# Altium PCB Copy of EVB_gate driver.PcbDoc
Units mil, origin at the board's own origin, x right, y up, seen from the top; angles counter-clockwise.
Board outline 1180 x 1310 mil, 2 copper layers (Top Layer, Bottom Layer); 26 components, 19 nets, 82 pads, 0 vias.
Unrouted connection lines stored in the file: 62.
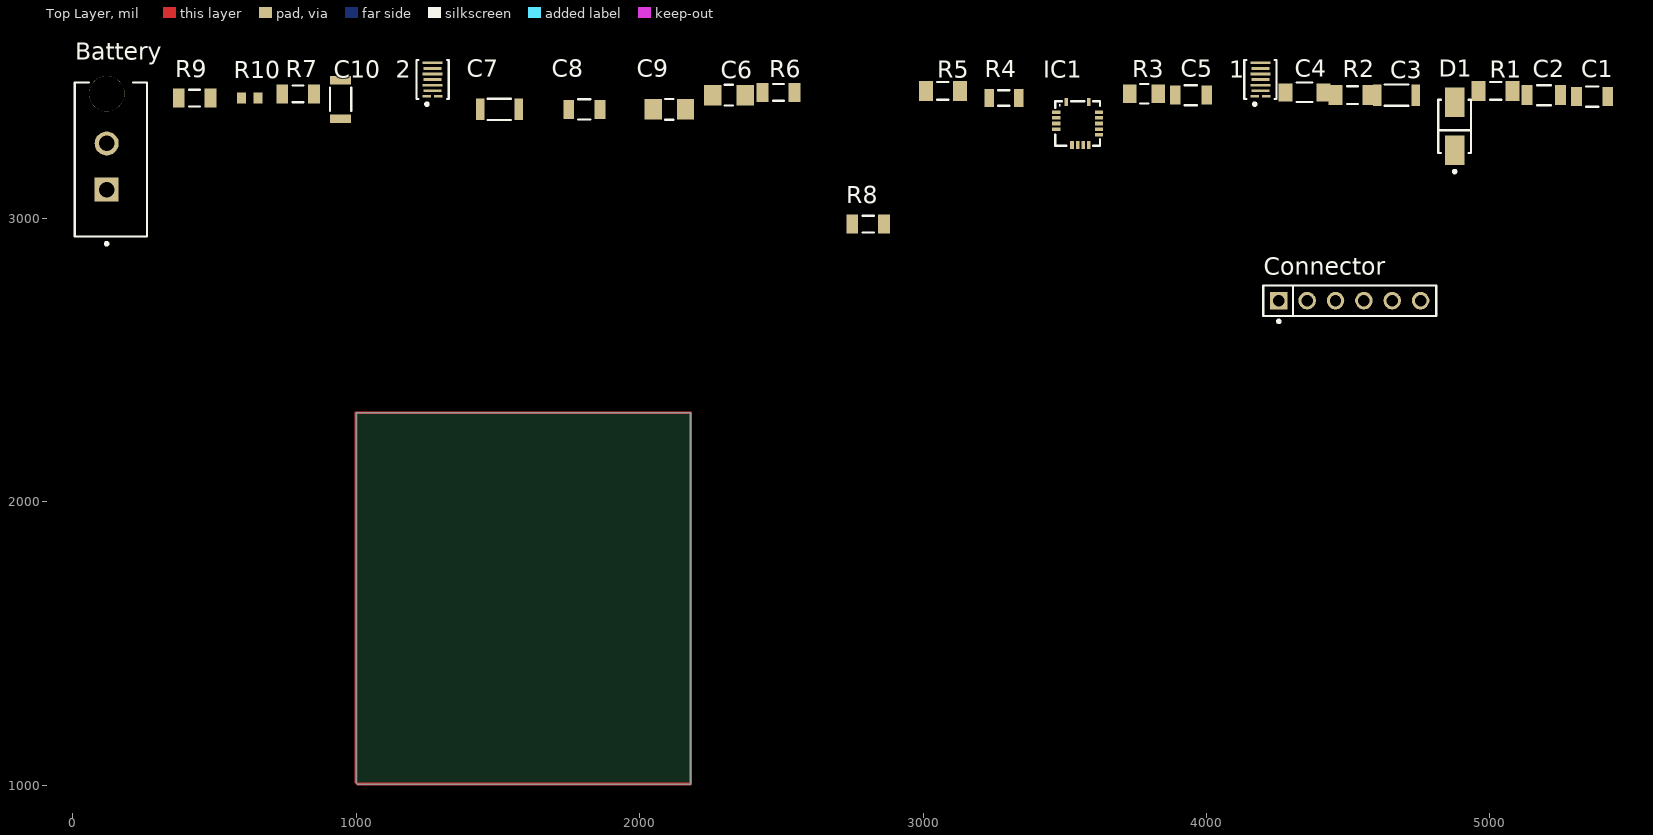
[diagram p0: Top Layer view]
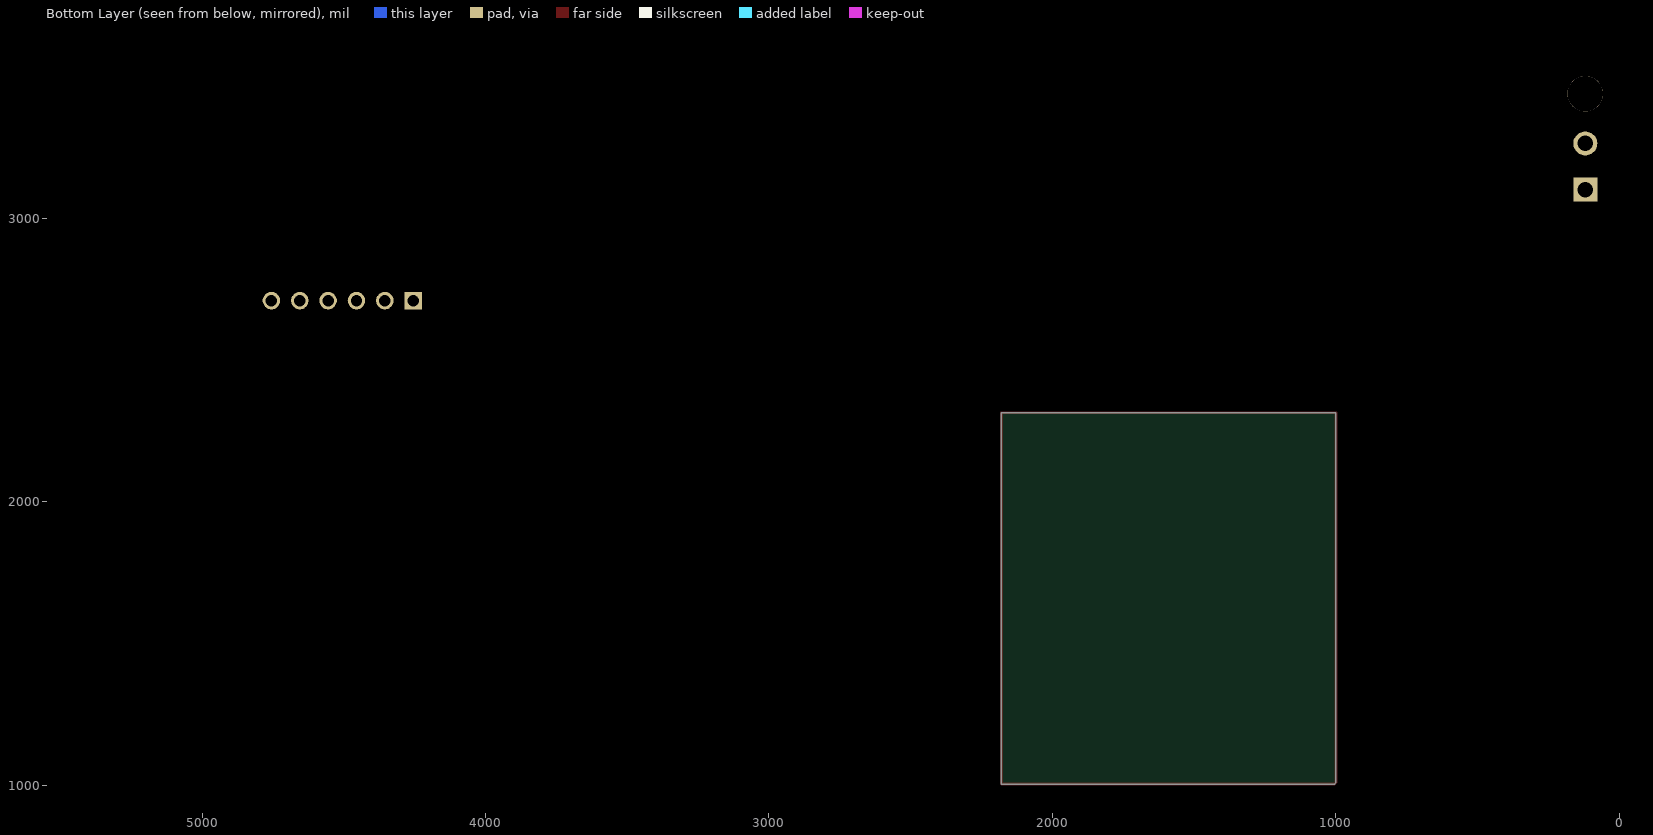
[diagram p1: Bottom Layer view, seen from below]

## Layer stack, top to bottom
Top Solder: solder mask 0.4, Solder Resist, Dk 3.5
Top Layer: signal copper 1.4
Dielectric 1: dielectric 12.6, FR-4, Dk 4.8
Bottom Layer: signal copper 1.4
Bottom Solder: solder mask 0.4, Solder Resist, Dk 3.5

## Board outline
2180,1005 2180,2315 1000,2315 1000,1010 1005,1005

## Design rules (kind name [scope] priority, off if disabled: settings)
Clearance [All] p1: gap=10 ignorepadtopadclearanceinfootprint=FALSE
PolygonConnect [All] p1: connectstyle=Relief reliefconductorwidth=10 reliefentries=4 polygonreliefangle="90 Angle" airgapwidth=10
RoutingVias [All] p1: holewidth=28 width=50 viastyle="Through Hole" minholewidth=28 minwidth=50 maxholewidth=28 maxwidth=50
SolderMaskExpansion [All] p1: expansion=4 istentingtop=FALSE
SupplyNets "Schematic Supply Nets" [InNet('GND')] p1: voltage=0.000
Width [All] p1: maxlimit=10 minlimit=10 preferedwidth=10
30 further rules are at their usual default settings.

## Classes and differential pairs
component class EVB_Gatedriver: 1 2 Battery C1 C2 C3 C4 C5 C6 C7 C8 C9 C10 Connector D1 IC1 R1 R2 R3 R4 R5 R6 R7 R9

## Components (designator, comment, footprint, x,y, rotation, side; value= is the part's Value field where it differs from the comment)
1 "GAN3R2-100CBE" FP-WLCSP8-SOT8072-MFG 4190.28,3490 r90 top
2 "GAN3R2-100CBE" FP-WLCSP8-SOT8072-MFG 1270.28,3490 r90 top
Battery "1-770166-1" FP-1-770166-1-MFG 135.43,3208.11 r90 top
C1 "10PF" FP-C1206C-EB-MFG 5360.28,3430 r0 top value="10 pF"
C2 "1uF" FP-CC1206-1_25-MFG 5190.28,3435 r0 top value="1 uF"
C3 "50u" FP-CGA5L-0_3-0_1-IPC_B 4670.28,3435 r0 top
C4 "100nF" FP-1206-L_3_2_0_15-W_1_6-MFG 4345.28,3445 r0 top
C5 "470uF" FP-C1206C-EB-MFG 3945.28,3435 r0 top value="0.47 μF"
C6 "1uF" FP-1206-L_3_2_0_15-W_1_6-IPC_A 2315.28,3435 r0 top
C7 "100uF" FP-CGA5L-0_3-0_1-IPC_B 1505.28,3385 r0 top
C8 "0.1uF" FP-C1206C-EB-MFG 1805.28,3385 r0 top value="0.10 μF"
C9 "1uF" FP-1206-L_3_2_0_15-W_1_6-IPC_A 2105.28,3385 r0 top
C10 "10u" FP-CGA5L-0_3-0_1-IPC_B 945.28,3420 r90 top
Connector "" FP-22-28-4060-MFG 4505.28,2710 r0 top
D1 "ES1J" FP-403AE-MFG 4875.28,3325 r90 top value=10pF
IC1 "NCP51820" NCP51820 3545.28,3335 r0 top
R1 "10K" RESC3116X65X40ML10T20 5020.28,3450 r0 top
R2 "10" RESC3116X65X40ML10T20 4515.28,3435 r0 top
R3 "2.0" FP-RMCF1206-IPC_C 3780.28,3440 r0 top
R4 "60.4" RESC3116X65X40LL10T20 3285.28,3425 r0 top
R5 "10" RESC3116X65X40ML10T20 3070.28,3450 r0 top
R6 "10" RESC3116X65X40NL10T20 2490.28,3445 r0 top
R7 "2.0" RESC3116X65X40NL10T20 795.28,3440 r0 top
R8 "10" RESC3116X65X40NL10T20 2806.38,2980 r0 top
R9 "2.0" RESC3116X65X40NL10T20 430.28,3425 r0 top
R10 "0" RESC1608X55X25ML10T15 625.28,3425 r0 top

## Footprints (in the part's own frame and the unit in brackets; to place one, negate y for a bottom-side part, rotate by r counter-clockwise, add the part's x,y. Pads: shape width x height; smd on the part's side, far side on the other; paste and mask are expansions set on the pad)
FP-1-770166-1-MFG [mm]
  rect 2.15x2.15 hole 1.4 paste-2539.97 mask+0: 1(-2.7,0.385)
  round 2.15 hole 1.4 paste-2539.97 mask+0: 2(1.44,0.385)
  round 3.18 hole 3.18 unplated paste-2539.97 mask+0: ""(5.89,0.385)
  silkscreen extent -7.67,-3.24 6.91,3.24, body extent -7.01,-3.34 7.58,3.34, height 0.25
FP-22-28-4060-MFG [mm]
  rect 1.57x1.57 hole 1.02 paste-2539.97 mask+0: 1(-6.35,0)
  round 1.57 hole 1.02 paste-2539.97 mask+0: 2(-3.81,0) 3(-1.27,0) 4(1.27,0) 5(3.81,0) 6(6.35,0)
  silkscreen extent -7.75,-1.97 7.75,1.37, body extent -7.85,-1.47 7.85,1.47, height 0.25
FP-403AE-MFG [mm]
  rect 2.65x1.75 smd paste+0 mask+0: 1(-2.15,0) 2(2.15,0)
  silkscreen extent -4.17,-1.48 2.37,1.48, body extent -3.57,-1.58 3.57,1.58, height 0.25
FP-1206-L_3_2_0_15-W_1_6-IPC_A [mil]
  rect 61.24x73.16 smd paste+0 mask+0: 1(-57.14,0) 2(57.14,0)
  silkscreen extent -15,-37 15,37, body extent -107,-56 107,56, height 10
FP-1206-L_3_2_0_15-W_1_6-MFG [mm]
  rect 1.25x1.6 smd paste+0 mask+0: 1(-1.7,0) 2(1.7,0)
  silkscreen extent -0.7,-0.87 0.7,0.87, body extent -2.42,-0.97 2.42,0.97, height 0.25
FP-C1206C-EB-MFG [mm]
  rect 0.95x1.7 smd paste+0 mask+0: 1(-1.4,0) 2(1.4,0)
  silkscreen extent -0.55,-0.9 0.55,0.9, body extent -2,-1 2,1, height 0.25
FP-CC1206-1_25-MFG [mm]
  rect 1x1.8 smd paste+0 mask+0: 1(-1.5,0) 2(1.5,0)
  silkscreen extent -0.63,-0.9 0.63,0.9, body extent -2.2,-1.25 2.2,1.25, height 0.25
FP-CGA5L-0_3-0_1-IPC_B [mm]
  rect 0.756x1.906 smd paste+0 mask+0: 1(-1.725,0) 2(1.725,0)
  silkscreen extent -1.05,-0.95 1.05,0.95, body extent -2.35,-1.2 2.35,1.2, height 0.25
FP-RMCF1206-IPC_C [mil]
  rect 47.39x65.28 smd paste+0 mask+0: 1(-50.22,0) 2(50.22,0)
  silkscreen extent -15,-34 15,34, body extent -78,-38 78,38, height 10
FP-WLCSP8-SOT8072-MFG [mm]
  rect 0.25x0.77 smd paste-1000 mask+0: 1(-1.5,0.512) 2(-1.5,-0.513)
  rect 0.25x1.62 smd paste-1000 mask+0: 3(-1,0) 5(0,0) 7(1,0)
  rect 0.25x1.8 smd paste-1000 mask+0: 4(-0.5,0) 6(0.5,0) 8(1.5,0)
  silkscreen extent -2.32,-1.44 1.75,1.44, body extent -1.85,-1.17 1.85,1.17, height 0.25
NCP51820 [mm]
  rect 0.75x0.32 smd: 1(-1.925,1) 2(-1.925,0.5) 3(-1.925,0) 4(-1.925,-0.5) 9(1.925,-1) 10(1.925,-0.5) 11(1.925,0) 12(1.925,0.5) 13(1.925,1)
  rect 0.32x0.75 smd: 5(-0.5,-1.925) 6(0,-1.925) 7(0.5,-1.925) 8(1,-1.925) 14(1,1.925) 15(-1,1.925)
  silkscreen extent -2,-2 2,2, body extent -1.84,-2.14 2.2,1.9, height 0.89
RESC1608X55X25ML10T15 [mm] "Chip Resistor, 2-Leads, Body 1.60x0.80mm, IPC Low Density"
  rect 0.8x1 smd: 1(-0.75,0) 2(0.75,0)
  body extent -0.85,-0.45 0.85,0.45, height 0.55
RESC3116X65X40LL10T20 [mm] "Chip Resistor, 2-Leads, Body 3.10x1.60mm, IPC High Density"
  rect 0.85x1.6 smd: 1(-1.325,0) 2(1.325,0)
  silkscreen extent -0.5,-0.7 0.5,0.7, body extent -1.6,-0.85 1.6,0.85, height 0.65
RESC3116X65X40ML10T20 [mm] "Chip Resistor, 2-Leads, Body 3.10x1.60mm, IPC Low Density"
  rect 1.25x1.8 smd: 1(-1.525,0) 2(1.525,0)
  silkscreen extent -0.5,-0.8 0.5,0.8, body extent -1.6,-0.85 1.6,0.85, height 0.65
RESC3116X65X40NL10T20 [mm] "Chip Resistor, 2-Leads, Body 3.10x1.60mm, IPC Medium Density"
  rect 1.05x1.7 smd: 1(-1.425,0) 2(1.425,0)
  silkscreen extent -0.5,-0.75 0.5,0.75, body extent -1.6,-0.85 1.6,0.85, height 0.65

## Part data
1 2: library part GAN3R2-100CBE_1, "GAN3R2-100CBE                                                                                                                                                                                                                                                     100 V, 3.2 mOhm Gallium Nitride (GaN) FET in a 3.5 mm x 2.13 mm Wafer Level Chip", Continuous Drain Current (ID)=60A, Drain to Source Breakdown Voltage=100V, Drain to Source Resistance=2.4mΩ, Gate to Source Voltage (Vgs)=-4V, Max Junction Temperature (Tj)=150°C, Min Operating Temperature=-40°C, Power Dissipation=394W, Drain to Source Voltage (Vdss)=100V, Height=464µm, Max Operating Temperature=150°C, MPN=GAN3R2-100CBE, NexarPartId=136220986, Number of Channels=1
Battery: library part CMP-03369-000027-1, "CONN HEADER VERT 2POS 4.14MM", Current Rating=9.5A, Manufacturer="TE Connectivity", Temperature="-55°C to +105°C", Temperature Range High=+105°C, Temperature Range Low=-55°C, Voltage Rating=600V, Automotive=No, Category=Conn, ComponentLink2Description=Datasheet, ComponentLink2URL=https://www.te.com/commerce/DocumentDelivery/DDEController?Action=showdoc&DocId=Customer+Drawing%7F770166%7FM%7Fpdf%7FEnglish%7FENG_CD_770166_M.pdf%7F1-770166-1, Conn Gender=Male, Conn Orientation=Vertical, Contact Material=Gold,Nickel, Device Class L1=Connectors, Device Class L2="Headers and Wire Housings", Device Class L3=unset, Digikey Description="CONN HEADER VERT 2POS 4.14MM", Height=14.51mm, Is Female=yes, Lead Free=Yes, Manufacturer Part Number=1-770166-1, Mouser Description="Mini-Universal MATE-N-LOK 2 Position Single Row Through-Hole Straight Pin Header", MPN=1-770166-1, Number Of Contacts=2, Number Of Rows=1, Octopart=https://octopart.com/1-770166-1-te+connectivity-46507887, Package=1-770166-1, Pitch=4.14mm, RoHS=TRUE, Standoff Height=0.63mm
C1: library part CMP-1037-00647-2, "CAP CER 10PF 50V C0G/NP0 1206", Capacitance="10 pF", Manufacturer=KEMET, Manufacturer Part Number=C1206C100J5GACTU, Package=C1206C-EB, Temperature="-55°C to +150°C", Temperature Characteristic=C0G, Temperature Coefficient=15%, Temperature Range High=+150°C, Temperature Range Low=-55°C, Tolerance=0.05, Voltage Rating="50 V", Automotive=Yes, Automotive Grade="Grade 0", Category=Cap, ComponentLink2Description=Datasheet, ComponentLink2URL=https://content.kemet.com/datasheets/KEM_C1007_X8R_ULTRA_150C_SMD.pdf, Device Class L1="Passive Components", Device Class L2=Capacitors, Device Class L3="Ceramic Capacitors", Digikey Description="CAP CER 10PF 50V C0G/NP0 1206", Height=0.88mm, Ipc Land Pattern Name=CAPC320160X78, Lead Free=Yes, Material=Ceramic, Mouser Description="Multilayer Ceramic Capacitors MLCC - SMD/SMT 50volts 10pF C0G 5%", Octopart=https://octopart.com/c1206c100j5gactu-kemet-87062, RoHS=TRUE
C2: library part CMP-1037-04701-3, "CAP CER 1UF 25V X7R 1206", Capacitance="1 uF", Manufacturer=Yageo, Manufacturer Part Number=CC1206KKX7R8BB105, Package=CC1206-1.25, Temperature="-55°C to +125°C", Temperature Characteristic=X7R, Temperature Coefficient=15%, Temperature Range High=+125°C, Temperature Range Low=-55°C, Tolerance=0.1, Voltage Rating="25 V", Automotive=No, Automotive Grade=NA, Category=Cap, ComponentLink2Description=Datasheet, ComponentLink2URL=http://www.yageo.com/documents/recent/UPY-NP0X7R_HV_1KV-to-3KV_11.pdf, Device Class L1="Passive Components", Device Class L2=Capacitors, Device Class L3="Ceramic Capacitors", Digikey Description="CAP CER 1UF 25V X7R 1206", Footprint Url=http://www.yageo.com/exep/pages/download/literatures/UPY-C_GEN_24.pdf, Height=1.45mm, Lead Free=Yes, Material=Ceramic, Mouser Description="Surface Mount Ceramic Multilayer Capacitor 1uF 10% X7R 25V 1206 Blister T/R", Octopart=https://octopart.com/cc1206kkx7r8bb105-yageo-11543785, RoHS=TRUE
C3 C7 C10: library part CMP-08246-001673-1, "Cap Ceramic 100nF 450V X7T 10% Pad SMD 1206 +125°C Automotive T/R", Capacitance=100nF, Case Code (Imperial)=1206, Case Code (Metric)=3216, Dielectric=X7T, Max Operating Temperature=125°C, Min Operating Temperature=-55°C, Package Quantity=1, Ratings=AEC-Q200, Tolerance=10%, Voltage Rating=450V, Case/Package=1206, Depth=1.6mm, Features="Soft Termination", Height=1.6mm, Lead Free="Lead Free", Length=3.2mm, Mount="Surface Mount", Packaging="Tape and Reel", REACH SVHC="No SVHC", Termination=SMD/SMT, Thickness=0.075inch, Voltage Rating (DC)=450V, Weight=0.000571oz, Width=0.063inch
C4: library part CMP-14477-000033-2, "None", RoHS Compliant=Yes
C5: library part CMP-1037-04557-2, "CAP CER 0.47UF 25V X5R 1206", Capacitance="0.47 μF", Manufacturer=KEMET, Manufacturer Part Number=C1206C474K3PACTU, Package=C1206C-EB, Temperature="-55°C to +150°C", Temperature Characteristic=X5R, Temperature Coefficient=15%, Temperature Range High=+150°C, Temperature Range Low=-55°C, Tolerance=0.1, Voltage Rating="25 V", Automotive=Yes, Automotive Grade="Grade 0", Category=Cap, ComponentLink2Description=Datasheet, ComponentLink2URL=https://content.kemet.com/datasheets/KEM_C1007_X8R_ULTRA_150C_SMD.pdf, Device Class L1="Passive Components", Device Class L2=Capacitors, Device Class L3="Ceramic Capacitors", Digikey Description="CAP CER 0.47UF 25V X5R 1206", Height=0.88mm, Ipc Land Pattern Name=CAPC320160X78, Lead Free=Yes, Material=Ceramic, Mouser Description="Multilayer Ceramic Capacitors MLCC - SMD/SMT 25volts 0.47uF X5R 10%", Octopart=https://octopart.com/c1206c474k3pactu-kemet-16430430, RoHS=TRUE
C6 C9: library part CMP-14477-003409-2, "None", Case Code (Imperial)=1206, Case Code (Metric)=3216, Dielectric=X5R, Max Operating Temperature=85°C, Min Operating Temperature=-55°C, Package Quantity=1, Resistor Type=Ceramic, Tolerance=10%, Voltage=25V, Capacitance=1uF, Case/Package=1206, Construction=Flat, Depth=1.6mm, Halogen Free="Halogen Free", Height=0.85mm, Lead Free="Lead Free", Length=3.2mm, Mount="Surface Mount", Number of Pins=2, Packaging="Tape and Reel", Radiation Hardening=No, RoHS Compliant=Yes, Series=M, Termination=SMD/SMT, Thickness=0.037inch, Voltage Rating=25V, Voltage Rating (DC)=25V, Width=0.063inch
C8: library part CMP-03020-001014-1, "CAP CER 0.1UF 25V 10% X7R 1206", Capacitance="0.10 μF", Manufacturer=KEMET, Manufacturer Part Number=C1206C104K3RACTU, Package=C1206C-EB, Temperature="-55°C to +150°C", Temperature Characteristic=X7R, Temperature Coefficient=15%, Temperature Range High=+150°C, Temperature Range Low=-55°C, Tolerance=0.1, Voltage Rating="25 V", Automotive=Yes, Automotive Grade="Grade 0", Category=Cap, ComponentLink2Description=Datasheet, ComponentLink2URL=https://content.kemet.com/datasheets/KEM_C1007_X8R_ULTRA_150C_SMD.pdf, Device Class L1="Passive Components", Device Class L2=Capacitors, Device Class L3="Ceramic Capacitors", Digikey Description="CAP CER 0.1UF 25V 10% X7R 1206", Height=0.88mm, Ipc Land Pattern Name=CAPC320160X78, Lead Free=Yes, Material=Ceramic, Mouser Description="CAP CER 0.1UF 25V X7R 1206", Octopart=https://octopart.com/c1206c104k3ractu-kemet-9144317, RoHS=TRUE
Connector: library part CMP-04776-000763-1, "CONN HEADER VERT 6POS 2.54MM", Color=Black, Contact Resistance=20mR, Current Rating=4A, Max Operating Temperature=75°C, Max Voltage Rating (AC)=250V, Max Voltage Rating (DC)=250.25kV, Min Operating Temperature=0°C, MPN=22-28-4060, Package Quantity=1, Connector Type="Male Pin", Contact Material=Brass, Contact Mating Length=0.24inch, Contact Plating=Tin, Contact Type="Male Pin", Depth=2.49mm, Gender=Male, Housing Color=Black, Housing Material=Thermoplastic, Length=15.24mm, Mount="Through Hole", Number Of Contacts=6, Number of Positions=6, Number Of Rows=1, Orientation=Straight, Packaging=Bulk, Pitch=2.54mm, RoHS Compliant=Yes, Series="KK® 42375", Termination=Solder, Voltage Rating=250V
D1: library part CMP-07163-000025-1, "DIODE GEN PURP 400V 1A SMA", Capacitance=10pF, Forward Current=1A, Manufacturer="ON Semiconductor", Manufacturer Part Number=ES1G, Max Junction Temp=+150°C, Max Repetitive Reverse Voltage=400V, Max Surge Forward Current=30A, Package=403AE, Peak Reverse Current=5uA, Temperature="to +150°C", Automotive=No, Category=Diode, ComponentLink2Description=Datasheet, ComponentLink2URL=https://www.onsemi.com/pub/Collateral/ES1J-D.PDF, Device Class L1="Discrete Semiconductors", Device Class L2=Diodes, Device Class L3="Rectifier Diodes", Digikey Description="DIODE GEN PURP 400V 1A SMA", Footprint Url=https://www.onsemi.com/pub/Collateral/403AE.PDF, Height=2.5mm, Lead Free=Yes, Mouser Description="Rectifiers 1.0 A Ultra Fast Recovery Rect", MPN=ES1J, Octopart=https://octopart.com/es1g-on+semiconductor-84324858, RoHS=TRUE, Standoff Height=0.05mm, Temperature Range High=+150°C
IC1: "Integrated Circuit", Manufacturer_Name=onsemi, Mouser Part Number=N/A, Datasheet Link=https://www.onsemi.com/download/data-sheet/pdf/ncp51820-d.pdf, Height=0.9mm, Manufacturer_Part_Number=NCP51820, Mouser Price/Stock=https://www.mouser.co.uk/ProductDetail/onsemi/NCP51820?qs=vEM7xhTegWhaPMdkL3AwCA%3D%3D, MPN=NCP51820
R1 R2 R5: library part CMP-1014-00623-2, "Chip Resistor, 10 KOhm, +/- 1%, 0.25 W, -55 to 155 degC, 1206 (3216 Metric), RoHS, Tape and Reel", Case Code (Imperial)=1206, Case Code (Metric)=3216, Manufacturer=Yageo, Max Operating Temperature=155degC, Min Operating Temperature=-55degC, Package Description="2-Pin Surface Mount Device, Body 3.1 x 1.6 mm", Package Quantity=5000, Package Reference=1206.0, Power Rating=250mW, Resistance=10KOhm, Temperature Coefficient=100ppm/degreesC, Tolerance=1%, Voltage Rating=200V, Case/Package=1206, Composition=ThickFilm, Datasheet URL=http://www.yageo.com/NewPortal/yageodocoutput?fileName=/pdf/R-Chip/PYu-RC_Group_51_RoHS_L_5.pdf, Datasheet Version="Rev. 5, 10/2016", Depth=1.6mm, Height=0.55mm, Lead Free=LeadFree, Length=3.1mm, Manufacturer URL=http://www.yageo.com/, Military Standard=Not, Packaging=TapeandReel, REACH SVHC=Unknown, RoHSCompliant=true, Termination=SMD/SMT, Width=1.6mm
R3: library part CMP-26527-002749-1, "RES 2 OHM 1% 1/4W 1206", Case Code (Imperial)=1206, Case Code (Metric)=3216, Max Operating Temperature=155°C, Max Power Dissipation=250mW, Min Operating Temperature=-55°C, Package Quantity=5000, Resistance=2R, Resistor Type="Thick Film", Temperature Coefficient=200ppm/°C, Tolerance=1%, Case/Package=1206, Contact Plating=Tin, Features="Automotive AEC-Q200", Height=0.028inch, Lead Free="Lead Free", Length=0.126inch, Mount="Surface Mount", Number of Terminations=2, Packaging="Tape and Reel", Radiation Hardening=No, RoHS Compliant=Yes, Series=RMCF, Width=0.063inch
R4: library part CMP-2003-03498-1, Manufacturer=Yageo, Part Number=RC1206FR-1360R4L
R6 R8: library part CMP-2003-04941-1, Manufacturer=Yageo, Part Number=RC1206FR-1310RL
R7 R9: library part CMP-2003-03966-1, Manufacturer=Yageo, Part Number=RC1206JR-072RL
R10: library part CMP-2100-03667-1, "Chip Resistor, 0 Ohm, +/- 5%, 0.1 W, -55 to 155 degC, 0603 (1608 Metric), RoHS, Tape and Reel", Case Code (Imperial)=0603, Case Code (Metric)=1608, Manufacturer=Yageo, Max Operating Temperature=155degC, Min Operating Temperature=-55degC, MPN=RC0603JR−070RL, Package Description="2-Pin Surface Mount Device, Body 1.6 x 0.8 mm", Package Quantity=5000, Power Rating=100mW, Resistance=0mOhm, Temperature Coefficient=200ppm/degreesC, Tolerance=5%, Voltage Rating=50V, Case/Package=0603, Composition=ThickFilm, Contact Plating=Tin, Datasheet URL=http://www.yageo.com/NewPortal/yageodocoutput?fileName=/pdf/R-Chip/PYu-RC_Group_51_RoHS_L_5.pdf, Datasheet Version="Rev. 5, 10/2016", Depth=0.8mm, Height=0.45mm, Lead Free=LeadFree, Length=1.6mm, Manufacturer URL=http://www.yageo.com/, Military Standard=Not, Number of Pins=2, Package Reference=0603, Packaging=TapeandReel, Radiation Hardening=No, REACH SVHC=NoSVHC, RoHSCompliant=true, Termination=SMD/SMT, Voltage Rating (DC)=50V, Width=0.8mm

## Nets (pads, with @x,y where several pads share a name; then routed paths per layer and width w, separated by ;. In a path a pad name is that pad's centre, name@x,y a point inside that pad or via, vN(x,y) a via of type N, cw(c..) or ccw(c..) an arc to the next point about the centre after c; other vN are vias at no path point)
GND: C1.2 C2.2 C4.1 C8.2 Connector.3 Connector.6 IC1.10 R4.2 R10.2
Net1_1: 1.1 R2.2 R6.1 R7.1
Net1_2: 1.2 1.4 1.6 1.8 2.3 2.5 2.7 C5.1 C6.1 IC1.4 R2.1
Net1_3: 1.3 1.5 1.7 Battery.1 C3.1 C7.1 C10.1
Net2_1: 2.1 R5.2 R8.1 R9.1
Net2_2: 2.2 2.4 2.6 2.8 Battery.2 C3.2 C7.2 C9.2 C10.2 IC1.8 R5.1 R10.1
NetC1_1: C1.1 Connector.1 IC1.13 R1.2
NetC2_1: C2.1 C4.2 Connector.2 IC1.14 R1.1 R3.2
NetC5_2: C5.2 D1.1 IC1.15
NetC6_2: C6.2 IC1.1
NetC8_1: C8.1 IC1.9 R4.1
NetC9_1: C9.1 IC1.5
NetConnector_4: Connector.4 IC1.12
NetConnector_5: Connector.5 IC1.11
NetD1_2: D1.2 R3.1
NetIC1_2: IC1.2 R6.2
NetIC1_3: IC1.3 R7.2
NetIC1_6: IC1.6 R8.2
NetIC1_7: IC1.7 R9.2
pads on no net: Battery.
copper on no net: | length 4977.1
  Top Layer w10: 1000,1010 1000,2315 2180,2315 2180,1005 1005,1005 1000,1010